# Altium PCB PCB.PcbDoc
Units mil, origin at the board's own origin, x right, y up, seen from the top; angles counter-clockwise.
Board outline 2204.72 x 1752.36 mil, 2 copper layers (Top Layer, Bottom Layer); 68 components, 58 nets, 232 pads, 7 vias.
Unrouted connection lines stored in the file: 129.
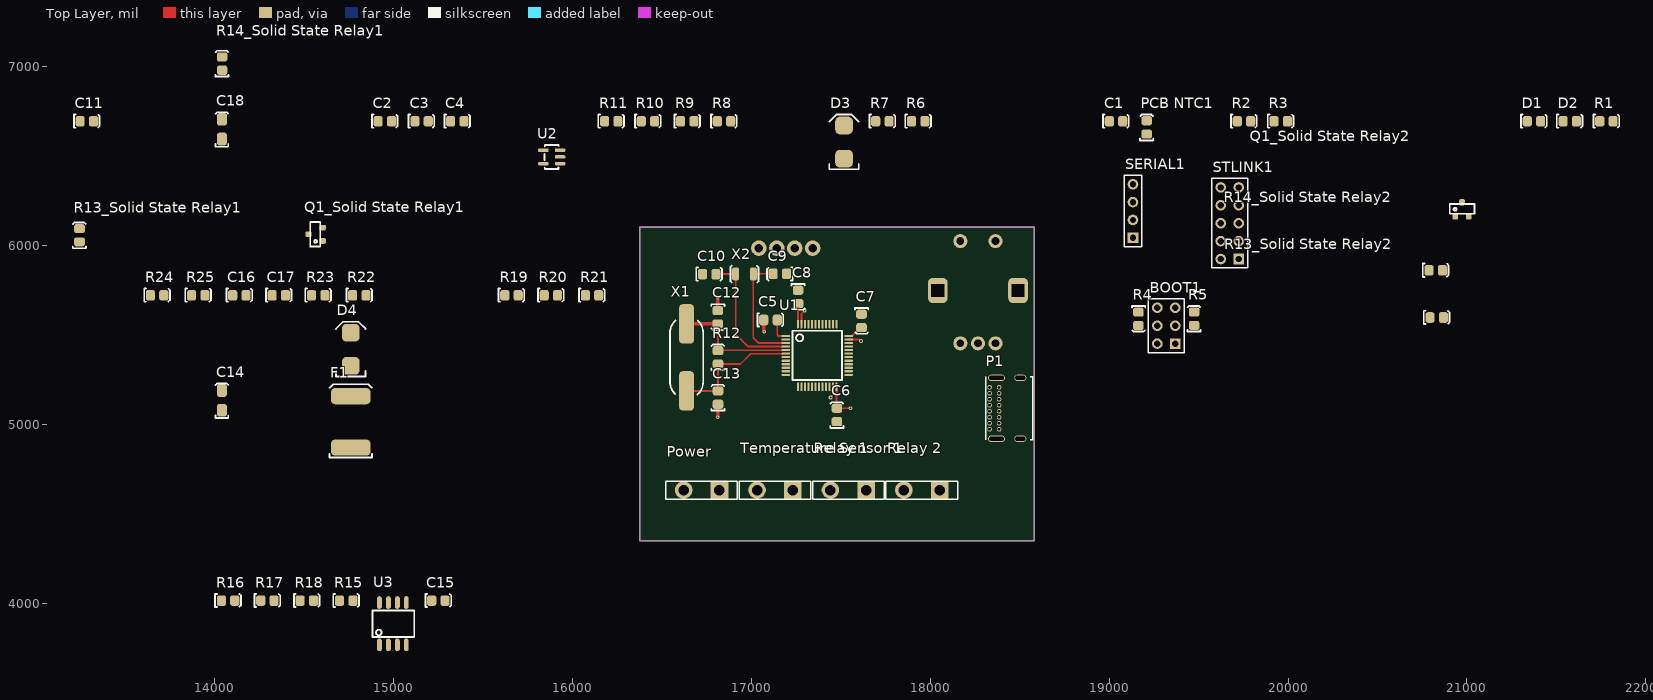
[diagram p0: Top Layer view]
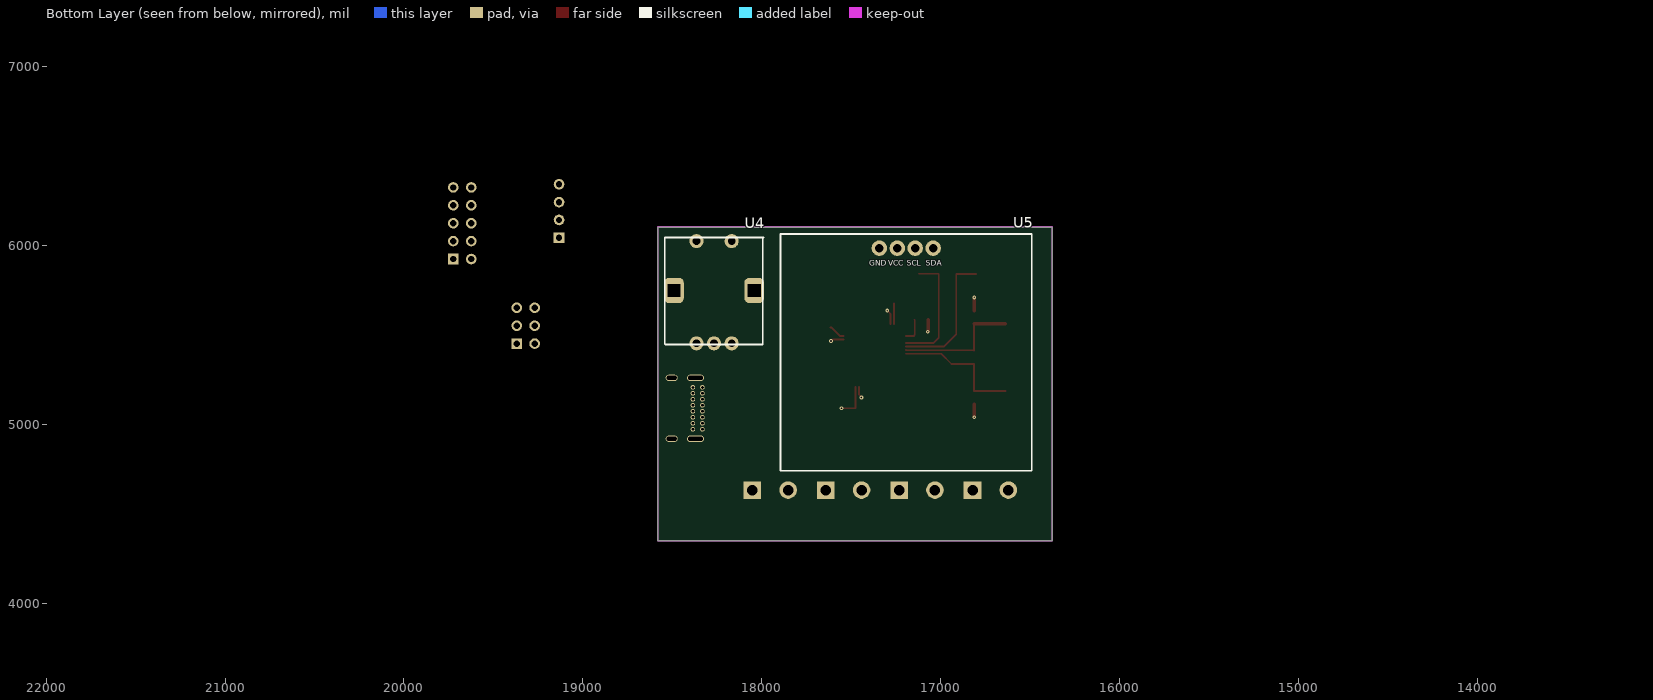
[diagram p1: Bottom Layer view, seen from below]

## Layer stack, top to bottom
Top Solder: solder mask 0.4, Solder Resist, Dk 3.5
Top Layer: signal copper 1.4
Dielectric 1: dielectric 12.6, FR-4, Dk 4.8
Bottom Layer: signal copper 1.4
Bottom Solder: solder mask 0.4, Solder Resist, Dk 3.5

## Board outline
16377.95,4350 18582.68,4350 18582.68,6102.36 16377.95,6102.36

## Design rules (kind name [scope] priority, off if disabled: settings)
Clearance [All] p1: gap=10 ignorepadtopadclearanceinfootprint=FALSE except(0: Arc-Hole Track-Hole SMDPad-Hole THPad-Hole Via-Hole Fill-Hole Poly-Hole Region-Hole Text-Hole; 3.94: THPad-THPad; 6: Arc-SMDPad Track-SMDPad SMDPad-SMDPad; 7.87: Arc-THPad Track-THPad SMDPad-THPad THPad-Via; 8: Arc-Arc Arc-Track Arc-Region Track-Track Track-Region SMDPad-Region THPad-Region Via-Region Fill-Region Poly-Region Region-Region; 23.62: Arc-Poly Track-Poly SMDPad-Poly THPad-Poly Via-Poly Fill-Poly Poly-Poly)
Height [All] p1: minheight=0 maxheight=1968.5 prefheight=500
HoleSize [All] p1: absolutevalues=TRUE maxlimit=393.7 minlimit=1 maxpercent=80.000 minpercent=20.000
PlaneClearance [All] p1: clearance=15.75
PlaneConnect [All] p1: pad.planeconnectstyle=Relief pad.reliefexpansion=20 pad.reliefentries=4 pad.reliefconductorwidth=31.5 pad.reliefairgap=10 via.planeconnectstyle=Direct via.reliefexpansion=20 via.reliefentries=4 via.reliefconductorwidth=31.5 via.reliefairgap=10
PolygonConnect [All] p1: thpad.connectstyle=Relief thpad.reliefconductorwidth=23.62 thpad.reliefentries=4 thpad.polygonreliefangle="90 Angle" thpad.airgapwidth=10 smdpad.connectstyle=Relief smdpad.reliefconductorwidth=23.62 smdpad.reliefentries=4 smdpad.polygonreliefangle="90 Angle" smdpad.airgapwidth=10 via.connectstyle=Direct via.reliefconductorwidth=23.62 via.reliefentries=4 via.polygonreliefangle="90 Angle" via.airgapwidth=10
RoutingVias [All] p1: holewidth=28 width=50 viastyle="Through Hole" minholewidth=8 minwidth=10 maxholewidth=28 maxwidth=50
SolderMaskExpansion [All] p1: expansion=2
Width [All] p1: maxlimit=118.11 minlimit=5 preferedwidth=19.68
26 further rules are at their usual default settings.

## Classes and differential pairs
channel class "Solid State Relay": "Solid State Relay1" "Solid State Relay2"
component class "User Interface": C16 C17 C18 R19 R20 R21 R22 R23 R24 R25 U4 U5
component class "U_Power Supply": C14 D4 F1
component class "Top Layer": Power "Relay 1" "Relay 2" "Temperature Sensor 1"
component class "Temperature Interface": C15 R15 R16 R17 R18 U3
component class "Solid State Relay2": "Q1_Solid State Relay2" "R13_Solid State Relay2" "R14_Solid State Relay2"
component class "Solid State Relay1": "Q1_Solid State Relay1" "R13_Solid State Relay1" "R14_Solid State Relay1"
component class Microcontroller: BOOT1 C1 C2 C3 C4 C5 C6 C7 C8 C9 C10 C11 C12 C13 D1 D2 D3 P1 "PCB NTC1" R1 R2 R3 R4 R5 R6 R7 R8 R9 R10 R11 R12 SERIAL1 STLINK1 U1 U2 X1 X2

## Components (designator, comment, footprint, x,y, rotation, side; value= is the part's Value field where it differs from the comment)
BOOT1 "2.54mm" "TH 2.54mm Header 2x3" 19370.08,5451.18 r90 top
C1 "100nF" 0805 19039.57,6694.37 r0 top
C2 "1µF" 0805 14954.57,6694.37 r0 top
C3 "100nF" 0805 15159.57,6694.37 r0 top
C4 "1µF" 0805 15359.57,6694.37 r0 top
C5 "1µF" 0805 17109.21,5583.94 r0 top
C6 "100nF" 0805 17478.97,5053.07 r90 top
C7 "100nF" 0805 17618.12,5577.56 r270 top
C8 "100nF" 0805 17263.79,5711.42 r270 top
C9 "22pF" 0805 17160.39,5839.84 r180 top
C10 "22pF" 0805 16766.69,5839.84 r0 top
C11 "22uF" 0805 13289.57,6694.37 r0 top
C12 "22pF" 0805 16815.17,5597.91 r270 top
C13 "22pF" 0805 16814.34,5150.04 r90 top
C14 "22uF" 1206 14043.82,5181.14 r90 top
C15 "100nF" 0805 15253.82,4016.14 r0 top
C16 "10nF" 0805 14142.2,5721.89 r0 top
C17 "10nF" 0805 14362.2,5721.89 r0 top
C18 "22uF" 1206 14043.82,6696.14 r90 top
D1 "Red" "0805 LED" 21374.57,6694.37 r0 top
D2 "Red" "0805 LED" 21574.57,6694.37 r0 top
D3 "SD560BTR" "SMB Diode" 17519.57,6494.37 r90 top
D4 "SD560BTR" "SMB Diode" 14763.78,5336.61 r90 top
F1 "0ZCF0100AF2A" 2920 14763.78,4870.08 r90 top
P1 "USB4085-GF-A" USB4085-GF-A 18491.15,5084.57 r90 top
"PCB NTC1" "10K (NTC) (B25/85 3430K)" 0805 19209.57,6659.37 r90 top
Power "5.08mm" "TH 5.08mm Header 1x2" 16823.62,4632.68 r180 top
"Q1_Solid State Relay1" "BC817-16LT1" "ON SOT-23 BJT" 14567.2,6061.89 r90 top (schematic designator Q1)
"Q1_Solid State Relay2" "BC817-16LT1" "ON SOT-23 BJT" 20972.44,6201.77 r0 top (schematic designator Q1)
R1 "10k" 0805 21779.57,6694.37 r0 top
R2 "510R" 0805 19754.57,6694.37 r0 top
R3 "510R" 0805 19959.57,6694.37 r0 top
R4 "10k" 0805 19165.4,5589.09 r270 top
R5 "10k" 0805 19474.36,5591.02 r90 top
R6 "10k" 0805 17934.57,6694.37 r0 top
R7 "1.5k" 0805 17734.57,6694.37 r0 top
R8 "20R" 0805 16849.57,6694.37 r0 top
R9 "20R" 0805 16644.57,6694.37 r0 top
R10 "5.1k" 0805 16424.57,6694.37 r0 top
R11 "5.1k" 0805 16219.57,6694.37 r0 top
R12 "10M" 0805 16814.34,5374.93 r90 top
"R13_Solid State Relay1" "680R" 0805 13247.2,6056.89 r90 top (schematic designator R13)
"R13_Solid State Relay2" "680R" 0805 20831.19,5597.93 r0 top (schematic designator R13)
"R14_Solid State Relay1" "10K" 0805 14043.82,7016.14 r90 top value=10k (schematic designator R14)
"R14_Solid State Relay2" "10K" 0805 20825.79,5861.22 r0 top value=10k (schematic designator R14)
R15 "0R" 0805 14738.82,4016.14 r0 top
R16 "5.6k" 0805 14078.82,4016.14 r0 top
R17 "5.6k" 0805 14298.82,4016.14 r0 top
R18 "5.6k" 0805 14518.82,4016.14 r0 top
R19 "10k" 0805 15662.2,5721.89 r0 top
R20 "10k" 0805 15882.2,5721.89 r0 top
R21 "10k" 0805 16112.2,5721.89 r0 top
R22 "10k" 0805 14812.2,5721.89 r0 top
R23 "10k" 0805 14582.2,5721.89 r0 top
R24 "5.6k" 0805 13682.2,5721.89 r0 top
R25 "5.6k" 0805 13912.2,5721.89 r0 top
"Relay 1" "5.08mm" "TH 5.08mm Header 1x2" 17643.62,4632.68 r180 top
"Relay 2" "5.08mm" "TH 5.08mm Header 1x2" 18053.62,4632.68 r180 top
SERIAL1 "2.54mm" "TH 2.54mm Header 1x4" 19133.86,6041.73 r90 top
STLINK1 "2.54mm" "TH 2.54mm Header 2x5" 19724.41,5923.62 r90 top
"Temperature Sensor 1" "5.08mm" "TH 5.08mm Header 1x2" 17233.62,4632.68 r180 top
U1 "STM32F103C8T6" "STM 48-LQFP" 17370,5385 r270 top
U2 "RT9193-33GB" "RICHTEK SOT-23-5" 15893.7,6496.06 r90 top
U3 "MAX6675" "MI 8-SOIC" 14998.82,3886.14 r0 top
U4 "PEC11R-4230F-S0024" PEC11R-4230F-S0024-ND 18267.72,5748.03 r180 bottom
U5 "1.3\" 64x128 SSD1306" "1.3\" 64x128 SSD1306" 17194.09,5984.25 r180 bottom
X1 "Value" "Abracon HC-49/US" 16640,5373.98 r90 top
X2 "32.768kHz" "EPSON 2-SMD" 16963.54,5839.84 r180 top

## Footprints (in the part's own frame and the unit in brackets; to place one, negate y for a bottom-side part, rotate by r counter-clockwise, add the part's x,y. Pads: shape width x height; smd on the part's side, far side on the other; paste and mask are expansions set on the pad)
"1.3\" 64x128 SSD1306" [mm]
  round 2.2 hole 1.2 unplated: 1(3.81,0) 2(1.27,0) 3(-1.27,0) 4(-3.81,0)
  silkscreen extent -17.83,-31.6 17.83,2, body extent -17.83,-31.6 17.83,2, height 0.25
0805 [mil]
  rrect50% 51.18x59.06 smd: 1(-37.87,-1.03) 2(36.93,-1.03)
  silkscreen extent -73,-37 71,37, body extent -39,-26 39,26, height 29
"0805 LED" [mil]
  rrect50% 51.18x59.06 smd: A(-37.87,-1.03) K(36.93,-1.03)
  silkscreen extent -73,-37 71,37, body extent -43,-25 35,25, height 39
1206 [mm]
  rrect50% 1.8x1.4 smd: 1(-2.6,0) 2(0.2,0)
  silkscreen extent -3.7,-0.9 1.2,0.9, body extent -2.9,-0.9 0.5,0.9, height 1.85
2920 [mm]
  rrect50% 2.3x5.6 smd: 1(0,0) 2(7.3,0)
  silkscreen extent -1.4,-3 9,3, body extent -0.34,-2.81 7.64,2.81, height 1.14
"Abracon HC-49/US" [mm]
  rrect50% 5.6x2.1 smd: 1(-4.75,0) 2(4.75,0)
  silkscreen extent -5.27,-2.35 5.25,2.35, body extent -6.35,-2.35 6.35,2.35, height 4.06
"EPSON 2-SMD" [mm]
  rrect50% 1x1.8 smd: 1(-1.25,0) 2(1.25,0)
  silkscreen extent -2,-1.2 2,1.2, body extent -1.5,-1 1.5,1, height 1
"MI 8-SOIC" [mm]
  oval 0.7x1.8 smd: 1(-1.905,-3) 2(-0.635,-3) 3(0.635,-3) 4(1.905,-3) 5(1.905,3) 6(0.635,3) 7(-0.635,3) 8(-1.905,3)
  silkscreen extent -2.87,-1.88 3.05,1.85, body extent -2.5,-3.1 2.5,3.1, height 1.76
"ON SOT-23 BJT" [mm] "NUP2105L"
  rrect50% 0.8x0.9 smd: B(-0.95,-1) C(0,1) E(0.95,-1)
  silkscreen extent -1.75,-0.65 1.75,0.75, body extent -1.5,-1.27 1.5,1.28, height 1
PEC11R-4230F-S0024-ND [mm]
  round 2 hole 1.1: 1(-2.5,-7.5) 2(2.5,-7.5) 3(0,-7.5) 4(-2.5,7) 5(2.5,7)
  rrect50% 2.8x3.6 hole 1.8 square: TAB(-5.7,0) TAB(5.7,0)
  silkscreen extent -7,-7.67 7,7.5, body extent -6.92,-7.67 6.92,7.18, height 21.7
"RICHTEK SOT-23-5" [mil]
  rrect50% 19x58 smd: 1(-39.37,-39.37) 2(-1.97,-39.37) 3(35.43,-39.37) 4(35.43,53.63) 5(-39.37,53.63)
  silkscreen extent -69,-31 64,47, body extent -62,-51 58,67, height 57
"SMB Diode" [mm]
  rrect50% 2.5x2.5 smd: A(-0.25,0) K(4.45,0)
  silkscreen extent -1.75,-2.1 6,2.1, body extent -0.69,-1.97 4.9,1.97, height 2.5
"STM 48-LQFP" [mm]
  rrect50% 0.3x1.2 smd mask+0.05: 1(-2.75,-4.45) 2(-2.25,-4.45) 3(-1.75,-4.45) 4(-1.25,-4.45) 5(-0.75,-4.45) 6(-0.25,-4.45) 7(0.25,-4.45) 8(0.75,-4.45) 9(1.25,-4.45) 10(1.75,-4.45) 11(2.25,-4.45) 12(2.75,-4.45) 25(2.75,4.45) 26(2.25,4.45) 27(1.75,4.45) 28(1.25,4.45) 29(0.75,4.45) 30(0.25,4.45) 31(-0.25,4.45) 32(-0.75,4.45) 33(-1.25,4.45) 34(-1.75,4.45) 35(-2.25,4.45) 36(-2.75,4.45)
  rrect50% 1.2x0.3 smd mask+0.05: 13(4.45,-2.75) 14(4.45,-2.25) 15(4.45,-1.75) 16(4.45,-1.25) 17(4.45,-0.75) 18(4.45,-0.25) 19(4.45,0.25) 20(4.45,0.75) 21(4.45,1.25) 22(4.45,1.75) 23(4.45,2.25) 24(4.45,2.75) 37(-4.45,2.75) 38(-4.45,2.25) 39(-4.45,1.75) 40(-4.45,1.25) 41(-4.45,0.75) 42(-4.45,0.25) 43(-4.45,-0.25) 44(-4.45,-0.75) 45(-4.45,-1.25) 46(-4.45,-1.75) 47(-4.45,-2.25) 48(-4.45,-2.75)
  silkscreen extent -3.5,-3.5 3.5,3.5, body extent -4.6,-4.6 4.6,4.6, height 1.6
"TH 2.54mm Header 1x4" [mm]
  rect 1.5x1.5 hole 0.9: 1(0,0)
  round 1.5 hole 0.9: 2(2.54,0) 3(5.08,0) 4(7.62,0)
  silkscreen extent -1.27,-1.27 8.89,1.27, body extent -1.27,-1.27 8.89,1.27, height 9.5
"TH 2.54mm Header 2x3" [mm]
  rect 1.5x1.5 hole 0.9: 1(0,0)
  round 1.5 hole 0.9: 2(0,2.54) 3(2.54,0) 4(2.54,2.54) 5(5.08,0) 6(5.08,2.54)
  silkscreen extent -1.27,-1.27 6.35,3.81, body extent -1.27,-1.27 6.35,3.81, height 9.5
"TH 2.54mm Header 2x5" [mm]
  rect 1.5x1.5 hole 0.9: 1(0,0)
  round 1.5 hole 0.9: 2(0,2.54) 3(2.54,0) 4(2.54,2.54) 5(5.08,0) 6(5.08,2.54) 7(7.62,0) 8(7.62,2.54) 9(10.16,0) 10(10.16,2.54)
  silkscreen extent -1.27,-1.27 11.43,3.81, body extent -1.27,-1.27 11.43,3.81, height 9.5
"TH 5.08mm Header 1x2" [mm]
  rect 2.5x2.5 hole 1.5: 1(0,0)
  round 2.5 hole 1.5: 2(5.08,0)
  silkscreen extent -2.54,-1.27 7.62,1.27, body extent -2.54,-3.98 7.61,4.02, height 10
USB4085-GF-A [mm]
  round 0.65 hole 0.4: A1(-2.848,4.025) A4(-1.998,4.025) A5(-1.148,4.025) A6(-0.298,4.025) A7(0.552,4.025) A8(1.402,4.025) A9(2.252,4.025) A12(3.102,4.025) B1(3.102,2.675) B4(2.252,2.675) B5(1.402,2.675) B6(0.552,2.675) B7(-0.298,2.675) B8(-1.148,2.675) B9(-1.998,2.675) B12(-2.848,2.675)
  oval 0.9x2.4 hole 0.6 slot 2.1 at 90 deg: P1(-4.198,3.045) P2(4.452,3.045)
  oval 0.9x1.7 hole 0.6 slot 1.4 at 90 deg: P3(4.452,-0.335) P4(-4.198,-0.335)
  silkscreen extent -4.35,-2.07 4.6,4.58, body extent -4.39,-4.56 4.64,4.61, height 3.46

## Part data
BOOT1: library part "TH 2.54mm Header 2x3", Angle=0, Contact=NA, Flange=No, Part Number="TH 2.54mm Header 2x3", Pitch=2.54mm, Positions=6, Row Spacing=2.54mm
C1: library part GCM21BR71E104KA37L, Digikey Part Number="DO NOT USE FOR NEW DESIGNS", Manufacturer=muRata, Rated Voltage=25V, Tolerance=10%, Material=X7R, Part Number=GCM21BR71E104KA37L
C2 C4 C5: library part GCM21BR71H105KA03L, Digikey Part Number=490-10675-1-ND, Manufacturer=muRata, Rated Voltage=50V, Tolerance=±10%, Material=X7R, Part Number=GCM21BR71H105KA03L
C3 C6 C7 C8 C15: library part GCM21BR71H104KA37L, Digikey Part Number=490-6064-1-ND, Manufacturer=muRata, Rated Voltage=50V, Tolerance=±10%, Material=X7R, Part Number=GCM21BR71H104KA37L
C9 C10 C12 C13: library part GRM21A5C2E220JW01D, Digikey Part Number=490-5534-1-ND, Manufacturer=muRata, Rated Voltage=250V, Tolerance=±5%, Material="C0G, NP0", Part Number=GRM21A5C2E220JW01D
C11: library part GRM21BR61A226ME51L, Digikey Part Number=490-10511-1-ND, Manufacturer=muRata, Rated Voltage=10V, Tolerance=20%, Material=X5R, Part Number=GRM21BR61A226ME51L
C14 C18: library part CC1206MKX5R7BB226, Digikey Part Number=311-1997-2-ND, Manufacturer=YAGEO, Rated Voltage=16V, Tolerance=20%, Material=Ceramic, Part Number=CC1206MKX5R7BB226
C16 C17: library part GCM2195C1H103JA16D, Digikey Part Number=490-4783-1-ND, Manufacturer=muRata, Rated Voltage=50V, Tolerance=±5%, Material="C0G, NP0", Part Number=GCM2195C1H103JA16D
D1 D2: library part SML-210LTT86, "Red LED Indication - Discrete 1.75V 0805 (2012 Metric)", Digikey Part Number=511-1286-1-ND, Manufacturer="ROHM Semiconductor", Colour=Red, Digikey Link=https://www.digikey.com/product-detail/en/rohm-semiconductor/SML-210LTT86/511-1286-1-ND/637099, Part Number=SML-210LTT86
D3 D4: "1.2V_F 600V 5A SMB", Digikey Part Number=1655-1530-2-ND, Manufacturer="SMC Diode Solutions", Digikey Link=https://www.digikey.com/product-detail/en/smc-diode-solutions/SD560BTR/1655-1530-2-ND/6022620, Part Number=SD560BTR
F1: "PTC RESET FUSE 60V 1A 292", Digikey Part Number=507-2070-1-ND, Manufacturer="Littelfuse Inc.", Digikey Link=https://www.digikey.com/product-detail/en/bel-fuse-inc/0ZCF0100AF2A/507-2070-1-ND/6210547, Part Number=0ZCF0100AF2A
P1: "USB - C (Type - C) USB 2.0 Receptacle Connector 16 Position Through Hole, Right Angle", Digikey Part Number=2073-USB4085-GF-ACT-ND, Angle=90, Digikey Link=https://www.digikey.ee/product-detail/en/gct/USB4085-GF-A/2073-USB4085-GF-ACT-ND/9859733, Part Number=USB4085-GF-A
"PCB NTC1": library part NTCS0805E3103FLT, Digikey Part Number=BC2733CT-ND, Manufacturer="Vishay Beyschlag", Rated Voltage=210mW, Tolerance=0.01, Part Number=NTCS0805E3103FLT
Power "Relay 1" "Relay 2" "Temperature Sensor 1": library part 1760510000, Digikey Part Number=281-1882-ND, Angle=0, Contact=NA, Digikey Link=https://www.digikey.com.au/product-detail/en/weidm%C3%BCller/1760510000/281-1882-ND/459739, Flange=No, Part Number=1760510000, Pitch=5.08mm, Positions=2, Row Spacing=0
"Q1_Solid State Relay1" "Q1_Solid State Relay2": "300mW  BJT NPN Transistor", Digikey Part Number=BC817-16LT1OSTR-ND, Manufacturer="ON Semiconductor", Digikey Link=https://www.digikey.com.au/product-detail/en/on-semiconductor/BC817-16LT1/BC817-16LT1OSTR-ND/606178, Part Number=BC817-16LT1
R1 R4 R5 R6 "R14_Solid State Relay1" "R14_Solid State Relay2" R19 R20 R21 R22 R23: library part RC0805FR0710KL, Digikey Part Number=311-10.0KCRCT-ND, Manufacturer=YAGEO, Rated Voltage=0.125W, Tolerance=0.01, Material=FR-07, Part Number=RC0805FR0710KL
R2 R3: library part RC0805FR07510RL, Digikey Part Number=311-510CRCT-ND, Manufacturer=YAGEO, Rated Voltage=0.125W, Tolerance=0.01, Material=FR-07, Part Number=RC0805FR07510RL
R7: library part RC0805FR071K5L, Digikey Part Number=311-1.50KCRCT-ND, Manufacturer=YAGEO, Rated Voltage=0.125W, Tolerance=0.01, Material=FR-07, Part Number=RC0805FR071K5L
R8 R9: library part RC0805FR0720RL, Digikey Part Number=311-20.0CRCT-ND, Manufacturer=YAGEO, Rated Voltage=0.125W, Tolerance=0.01, Material=FR-07, Part Number=RC0805FR0720RL
R10 R11: library part RC0805FR075K1L, Digikey Part Number=311-5.10KCRCT-ND, Manufacturer=YAGEO, Rated Voltage=0.125W, Tolerance=0.01, Material=FR-07, Part Number=RC0805FR075K1L
R12: library part RC0805FR0710ML, Digikey Part Number=311-10.0MCRCT-ND, Manufacturer=YAGEO, Rated Voltage=0.125W, Tolerance=0.01, Material=FR-07, Part Number=RC0805FR0710ML
"R13_Solid State Relay1" "R13_Solid State Relay2": library part RC0805FR07680RL, Digikey Part Number=311-680CRCT-ND, Manufacturer=YAGEO, Rated Voltage=0.125W, Tolerance=0.01, Material=FR-07, Part Number=RC0805FR07680RL
R15: library part RC0805FR070RL, Digikey Part Number=311-0.0CRCT-ND, Manufacturer=YAGEO, Rated Voltage=0.125W, Tolerance=0.01, Material=FR-07, Part Number=RC0805FR070RL
R16 R17 R18 R24 R25: library part RC0805FR075K6L, Digikey Part Number=311-5.60KCRCT-ND, Manufacturer=YAGEO, Rated Voltage=0.125W, Tolerance=0.01, Material=FR-07, Part Number=RC0805FR075K6L
SERIAL1: library part "TH 2.54mm Header 1x4", Angle=0, Contact=NA, Flange=No, Part Number="TH 2.54mm Header 1x4", Pitch=2.54mm, Positions=4, Row Spacing=2.54mm
STLINK1: library part "TH 2.54mm Header 2x5", Angle=0, Contact=NA, Flange=No, Part Number="TH 2.54mm Header 2x5", Pitch=2.54mm, Positions=10, Row Spacing=2.54mm
U1: "ARM® Cortex®-M3 STM32F1 Microcontroller IC 32-Bit 72MHz 64KB (64K x 8) FLASH", Digikey Part Number=497-6063-ND, Manufacturer=STMicroelectronics, Digikey Link=https://www.digikey.com/product-detail/en/stmicroelectronics/STM32F103C8T6/497-6063-ND/1646338, Part Number=STM32F103C8T6
U2: "IC REG LINEAR 3.3V 300MA SOT23-5", Digikey Part Number=1028-1014-1-ND, Manufacturer=Richtek, Digikey Link=https://www.digikey.com/products/en?keywords=1028-1014-1-ND, Part Number=RT9193-33GB
U3: "IC THERMOCOUP TO DGTL 8-SOIC", Digikey Part Number=MAX6675ISA+-ND, Manufacturer="Maxim Integrated", Digikey Link=https://www.digikey.com/product-detail/en/maxim-integrated/MAX6675ISA/MAX6675ISA-ND/1513517, Part Number=MAX6675
U4: "Quadrature Rotary encoder w/ pushbutton", Digikey Part Number=PEC11R-4230F-S0024-ND, Manufacturer="Bourns Inc.", Digikey Link=https://www.digikey.com/product-detail/en/bourns-inc/PEC11R-4230F-S0024/PEC11R-4230F-S0024-ND/4699230, Part Number=PEC11R-4230F-S0024
U5: "1.3\" I2C OLED display using SSD1306 Driver", Manufacturer=IIC, Part Number="1.3\" 64x128 SSD1306"
X1: library part ABLS-16.000MHZ-B4-T, Digikey Part Number=535-10226-1-ND, Load Capacitance=18pF, Manufacturer="Abracon LLC", Digikey Link=https://www.digikey.com/product-detail/en/abracon-llc/ABLS-16.000MHZ-B4-T/535-10226-1-ND/2184261, ESR=40R, Part Number=ABLS-16.000MHZ-B4-T
X2: library part "FC-135 32.7680KA-A5", Digikey Part Number=SER4103TR-ND, Load Capacitance=12.5pF, Manufacturer=EPSON, Digikey Link=https://www.digikey.com/product-detail/en/epson/FC-135-32.7680KA-A5/SER4103TR-ND/5259895, ESR=70k, Part Number="FC-135 32.7680KA-A5"

## Via types
v1: diameter 21.65, hole 9.84, Top Layer to Bottom Layer, 7 vias

## Nets (pads, with @x,y where several pads share a name; then routed paths per layer and width w, separated by ;. In a path a pad name is that pad's centre, name@x,y a point inside that pad or via, vN(x,y) a via of type N, cw(c..) or ccw(c..) an arc to the next point about the centre after c; other vN are vias at no path point)
0V: "Q1_Solid State Relay1.E" "Q1_Solid State Relay2.E" "R14_Solid State Relay1.1" "R14_Solid State Relay2.1" "Relay 1.2" "Relay 2.2" C14.1 C15.1 C16.1 C17.1 C18.1 Power.2 R15.1 R16.1 R17.1 R18.1 U3.1 U4.3 U4.5 U5.4
"0V (ISO)": "PCB NTC1.1" BOOT1.5 BOOT1.6 C1.1 C2.1 C3.1 C4.1 C5.1 C6.1 C7.1 C8.1 C9.1 C10.1 C11.1 C12.1 C13.1 P1.A1 P1.A12 P1.B1 P1.B12 P1.P1 R2.1 R10.2 R11.2 SERIAL1.4 STLINK1.1 U1.8 U1.23 U1.35 U1.47 U2.2 | length 435.1
  Top Layer w10: U1.47 17281.42,5616.42 v1(17300,5635) ; v1(17445,5150) 17445,5153.15 17458.58,5166.74 U1.23 ; U1.35 17603.26,5473.58 17611.85,5465 v1(17615,5465)
  Top Layer w19.68: v1(16814.13,5039.61) 16814.51,5039.98 16814.51,5111.31 C13.1 ; C12.1 v1(16814.13,5709.61) ; C5.1 17071.34,5519.45 v1(17073.78,5517.01)
"3.3V (ISO)": BOOT1.1 BOOT1.2 C3.2 C4.2 C5.2 C6.2 C7.2 C8.2 D1.A D2.A R6.2 SERIAL1.1 STLINK1.7 STLINK1.8 U1.1 U1.9 U1.24 U1.36 U1.48 U2.5 | length 538.4
  Top Layer w10: C5.2@17147.68,5584.44 C5.2 17146.14,5499.77 17152.64,5493.27 U1.1 ; U1.48 17261.73,5673.46 C8.2 ; U1.24 17478.27,5091.73 C6.2 v1(17555,5090) ; U1.36 17562.91,5493.27 17610.28,5540.63 C7.2
5V: C14.2 C15.2 C18.2 D4.K R19.2 R20.2 R21.2 R24.2 R25.2 U3.4 U5.3
"5V (ISO)": C2.2 D3.K R1.2 R7.2 U2.1 U2.3
BOOT0: BOOT1.3 R5.1
BOOT1: BOOT1.4 R4.2
NetC1_2: "PCB NTC1.2" C1.2 R1.1
NetC11_2: C11.2 U2.4
NetC16_2: C16.2 R19.1 R22.2 U4.1
NetC17_2: C17.2 R20.1 R23.2 U4.2
NetD1_K: D1.K R2.2
NetD2_K: D2.K R3.2
NetD3_A: D3.A P1.A4 P1.A9 P1.B4 P1.B9
NetD4_A: D4.A F1.2
NetF1_1: F1.1 Power.1
NetP1_A5: P1.A5 R10.1
NetP1_A6: P1.A6 P1.B6 R8.1
NetP1_A7: P1.A7 P1.B7 R9.1
NetP1_B5: P1.B5 R11.1
"NetQ1_Solid State Relay1_B": "Q1_Solid State Relay1.B" "R13_Solid State Relay1.1"
"NetQ1_Solid State Relay1_C": "Q1_Solid State Relay1.C" "Relay 2.1"
"NetQ1_Solid State Relay2_B": "Q1_Solid State Relay2.B" "R13_Solid State Relay2.1"
"NetQ1_Solid State Relay2_C": "Q1_Solid State Relay2.C" "Relay 1.1"
NetR4_1: R4.1 U1.20
NetR5_2: R5.2 U1.44
"NetR13_Solid State Relay1_2": "R13_Solid State Relay1.2" "R14_Solid State Relay1.2"
"NetR13_Solid State Relay2_2": "R13_Solid State Relay2.2" "R14_Solid State Relay2.2" U1.45
NetR15_2: R15.2 U3.2
NetR16_2: R16.2 U3.6
NetR17_2: R17.2 U3.5
NetR18_2: R18.2 U3.7
NetR21_1: R21.1 U4.4
NetR22_1: R22.1
NetR23_1: R23.1
NetR24_1: R24.1 U5.1
NetR25_1: R25.1 U5.2
"NetTemperature Sensor 1_1": "Temperature Sensor 1.1" U3.3
NetU1_14: U1.14
NetU1_15: U1.15
NetU1_16: U1.16
NetU1_21: U1.21
NetU1_22: U1.22
NetU1_42: U1.42
NetU1_43: U1.43
NetU1_46: U1.46
NRST: R6.1 STLINK1.2 U1.7
PC13: R3.1 U1.2
SWCLK: STLINK1.3 U1.37
SWDIO: STLINK1.5 U1.34
UARTRX: SERIAL1.3 U1.13
UARTTX: SERIAL1.2 U1.12
USBDM: R9.2
USBDP: R7.1 R8.2
XTALA: C12.2 R12.2 U1.5 X1.2 | length 704.3
  Top Layer w10: X1.2@16638.77,5559.75 X1.2 ; C12.2@16815.37,5559.75 R12.2 16817.13,5413.62 17193.9,5413.62 U1.5
  Top Layer w19.68: X1.2 C12.2
XTALB: C13.2 R12.1 U1.6 X1.1 | length 728.8
  Top Layer w10: X1.1 C13.2 R12.1 16941.07,5337.06 16998.86,5394.84 U1.6
XTALC: C9.2 U1.3 X2.1 | length 661.8
  Top Layer w10: C9.2 17013.79,5840.87 X2.1 17012.76,5483.54 17042.4,5453.9 U1.3
XTALD: C10.2 U1.4 X2.2 | length 756.8
  Top Layer w10: C10.2 16804.65,5839.84 X2.2 16914.33,5503.23 16983.35,5434.21 U1.4
pads on no net: "Temperature Sensor 1.2" P1.A8 P1.B8 P1.P2 P1.P3 P1.P4 STLINK1.4 STLINK1.6 STLINK1.9 STLINK1.10 U1.10 U1.11 U1.17 U1.18 U1.19 U1.25 U1.26 U1.27 U1.28 U1.29 U1.30 U1.31 U1.32 U1.33 U1.38 U1.39 U1.40 U1.41 U3.8 U4.TAB

## Keep-outs
Keep-Out Layer:
  the board outline again, w10

## Text inside footprints (layer, text, board x,y; h text height)
U5: Bottom Overlay "GND" at 17400.79,5885.83 h31.5; Bottom Overlay "VCC" at 17295.8,5885.83 h31.5; Bottom Overlay "SCL" at 17190.81,5885.83 h31.5; Bottom Overlay "SDA" at 17085.83,5885.83 h31.5